# Altium PCB SoundNicerPCB.PcbDoc
Units mil, origin at the board's own origin, x right, y up, seen from the top; angles counter-clockwise.
Board outline 557.21 x 4336.74 mil, 2 copper layers (Top Layer, Bottom Layer); 44 components, 30 nets, 131 pads, 79 vias.
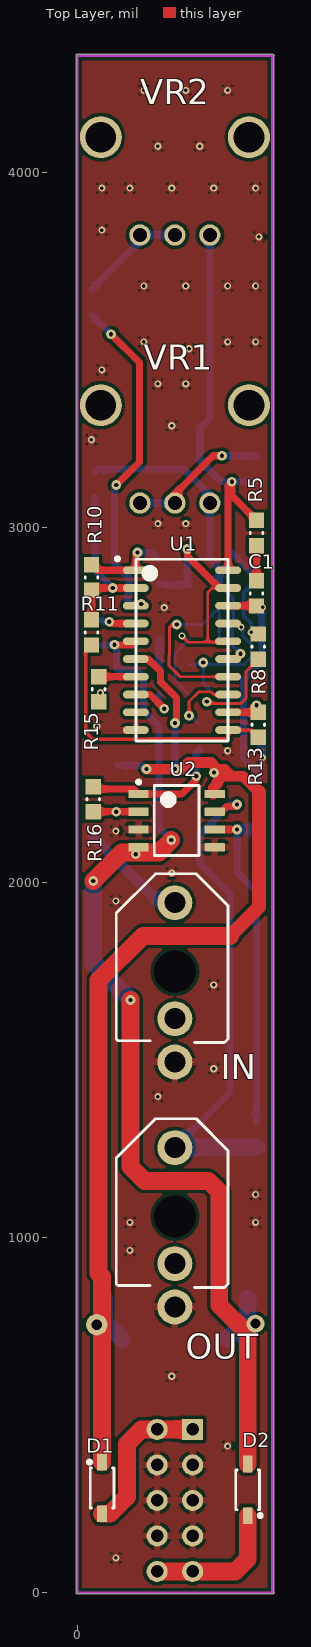
[diagram p0: Top Layer view]
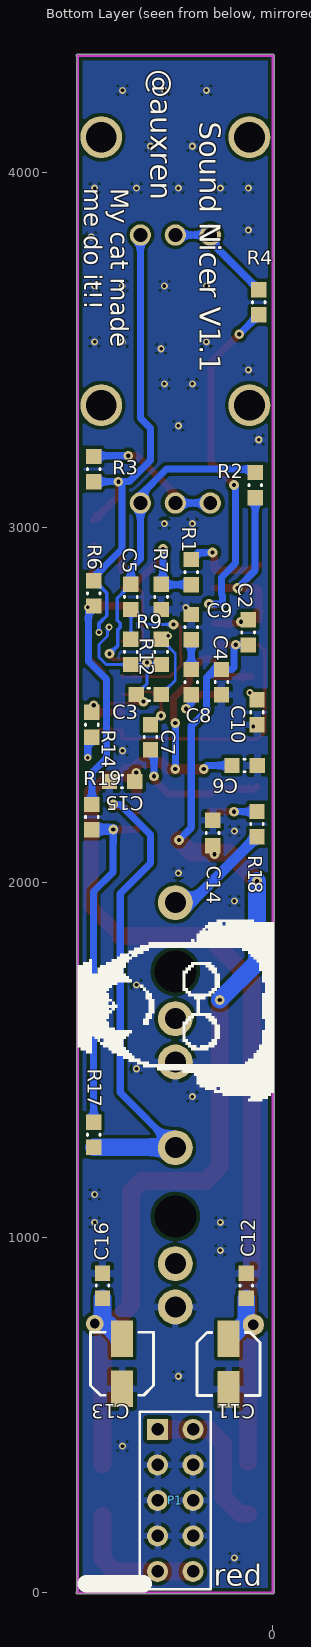
[diagram p1: Bottom Layer view, seen from below]

## Layer stack, top to bottom
Top Solder: solder mask 0.4, Solder Resist, Dk 3.5
Top Layer: signal copper 1.4
Dielectric 1: dielectric 12.6, FR-4, Dk 4.8
Bottom Layer: signal copper 1.4
Bottom Solder: solder mask 0.4, Solder Resist, Dk 3.5

## Board outline
-3.02,0 ccw(c0,0) 0,-3.01 551.18,-3.01 ccw(c551.18,0) 554.2,0 ccw(c551.18,0) 553.02,2.39 553.02,4327.61 ccw(c551.18,4330) 554.2,4330 ccw(c551.18,4330) 552.1,4332.87 ccw(c550,4330.71) 548.06,4333.02 1.94,4333.02 ccw(c0,4330.71) -3.02,4330.71

## Design rules (kind name [scope] priority, off if disabled: settings)
Clearance [All] p1: gap=10 ignorepadtopadclearanceinfootprint=FALSE except(0: Arc-Hole Track-Hole SMDPad-Hole THPad-Hole Via-Hole Fill-Hole Poly-Hole Region-Hole Text-Hole)
PlaneConnect [All] p1: planeconnectstyle=Relief reliefexpansion=20 reliefentries=4 reliefconductorwidth=20 reliefairgap=10
PolygonConnect [All] p1: connectstyle=Relief reliefconductorwidth=20 reliefentries=4 polygonreliefangle="90 Angle" airgapwidth=10
RoutingVias [All] p1: holewidth=11.81 width=27.56 viastyle="Through Hole" minholewidth=11.81 minwidth=27.56 maxholewidth=28 maxwidth=27.56
SolderMaskExpansion [All] p1: expansion=4
Width [All] p1: maxlimit=50 minlimit=8 preferedwidth=20
29 further rules are at their usual default settings.

## Components (designator, comment, footprint, x,y, rotation, side; value= is the part's Value field where it differs from the comment)
C1 "100pF" CAPC0603(1608)100_M 505,2815 r270 top value=100p
C2 "2.2uF" CAPC0603(1608)100_M 70,2705 r90 bottom value=2.2u
C3 "3.3nF" CAPC0603(1608)100_M 350,2530 r0 bottom value=3.3n
C4 "0.47uF" CAPC0603(1608)100_M 145,2565 r90 bottom
C5 "33nF" CAPC0603(1608)100_M 400,2805 r90 bottom value=33n
C6 "0.47uF" CAPC0603(1608)100_M 80,2330 r0 bottom
C7 "0.47uF" CAPC0603(1608)100_M 345,2410 r270 bottom
C8 "2.2uF" CAPC0603(1608)100_M 230,2565 r270 bottom value=2.2u
C9 "2.2uF" CAPC0603(1608)100_M 230,2720 r270 bottom value=2.2u
C10 "100nF" CAPC0603(1608)100_M 45,2480 r270 bottom
C11 "10uF" NIC-CAPA2-4X5.8_V 125,644.13 r270 bottom
C12 "100nF" CAPC0603(1608)100_M 75,865 r90 bottom
C13 "10uF" NIC-CAPA2-4X5.8_V 425,645 r90 bottom
C14 "100nF" CAPC0603(1608)100_M 170,2140 r270 bottom
C15 "100nF" CAPC0603(1608)100_M 425,2285 r0 bottom
C16 "100nF" CAPC0603(1608)100_M 480,865 r90 bottom
D1 "1N5819HW-7-F" DIOD-SOD-123-2_V 70,295 r90 top
D2 "1N5819HW-7-F" DIOD-SOD-123-2_V 480,290 r270 top
IN "Thonkicon jack" "Thonkiconn Pot PJ301M" 275,1750 r0 top (schematic designator J1)
OUT "Thonkicon jack" "Thonkiconn Pot PJ301M" 275,1060 r0 top (schematic designator J2)
P1 "Header 5X2" HDR2X5 325,460 r270 bottom
R1 "21.5k" RESC0603(1608)_M 230,2875 r90 bottom
R2 "21.5k" RESC0603(1608)_M 50,3120 r270 bottom
R3 "820" RESC0603(1608)_M 505,3165 r270 bottom
R4 "820" RESC0603(1608)_M 40,3635 r270 bottom
R5 "10k" RESC0603(1608)_M 505,2985 r90 top
R6 "18.2k" RESC0603(1608)_M 505,2815 r90 bottom
R7 "21.5k" RESC0603(1608)_M 315,2805 r90 bottom
R8 "39.2k" RESC0603(1608)_M 510,2665 r90 top
R9 "21.5k" RESC0603(1608)_M 315,2650 r270 bottom
R10 "21.5k" RESC0603(1608)_M 40,2860 r270 top
R11 "21.5k" RESC0603(1608)_M 40,2705 r270 top
R12 "21.5k" RESC0603(1608)_M 400,2650 r90 bottom
R13 "21.5k" RESC0603(1608)_M 510,2445 r270 top
R14 "21.5k" RESC0603(1608)_M 510,2445 r90 bottom
R15 "10.6k" RESC0603(1608)_M 60,2545 r90 top
R16 "75k" RESC0603(1608)_M 45,2235 r270 top
R17 "100k" RESC0603(1608)_M 505,1290 r90 bottom
R18 "100k" RESC0603(1608)_M 45,2165 r270 bottom
R19 "75k" RESC0603(1608)_M 510,2185 r90 bottom
U1 "V2153 Sound Enhancement IC" "SOIC20 - duplicate" 295,2655 r0 top
U2 "TL072ID" D0008A_N 280,2175 r0 top
VR1 "B10k" SonGueiPot 275,3345 r0 top
VR2 "B10k" SonGueiPot 275,4100 r0 top

## Footprints (in the part's own frame and the unit in brackets; to place one, negate y for a bottom-side part, rotate by r counter-clockwise, add the part's x,y. Pads: shape width x height; smd on the part's side, far side on the other; paste and mask are expansions set on the pad)
CAPC0603(1608)100_M [mm] "Chip Capacitor, Body 1.6x0.8mm, Height 1.0mm, IPC Low Density"
  rect 1.1x1.1 smd: 1(-0.9,0) 2(0.9,0)
  silkscreen extent -0.05,-0.45 0.05,0.45, body extent -0.87,-0.47 0.88,0.48, height 1
D0008A_N [mm] "SOIC, 8-Leads, Body 5x4mm, Pitch 1.27mm, IPC Medium Density"
  rrect17% 1.45x0.6 smd: 1(-2.725,1.905) 2(-2.725,0.635) 3(-2.725,-0.635) 4(-2.725,-1.905) 5(2.725,-1.905) 6(2.725,-0.635) 7(2.725,0.635) 8(2.725,1.905)
  silkscreen extent -2.85,-2.5 1.6,2.88, body extent -3,-2.45 3,2.45, height 1.63
DIOD-SOD-123-2_V [mm] "SOD-123, 2-Leads, Body 2.85x1.7mm (max), Pitch 3.7mm"
  rect 1.2x0.7 smd: 1(-1.85,0) 2(1.85,0)
  silkscreen extent -1.43,-0.85 1.97,1.02, body extent -1.42,-0.85 1.43,0.85, height 1.45
HDR2X5 [mm] "Connector; Header; 5x2 Position"
  rect 1.5x1.5 hole 0.9: 1(0,0)
  round 1.5 hole 0.9: 2(0,2.54) 3(2.54,0) 4(2.54,2.54) 5(5.08,0) 6(5.08,2.54) 7(7.62,0) 8(7.62,2.54) 9(10.16,0) 10(10.16,2.54)
  silkscreen extent -1.27,-1.27 11.43,3.81
NIC-CAPA2-4X5.8_V [mm] "Aluminum Electrolytic Capacitor, Diameter 4mm, Height 6.1mm, Pitch 3.6mm"
  rect 2.6x1.6 smd: 1(-1.8,0) 2(1.8,0)
  silkscreen extent -2.25,-2.25 2.25,2.25, body extent -2,-2 2,2, height 6.1
RESC0603(1608)_M [mm] "Chip Resistor, Body 1.6x0.8mm, IPC Low Density"
  rect 1.1x1.1 smd: 1(-0.9,0) 2(0.9,0)
  silkscreen extent -0.05,-0.45 0.05,0.45, body extent -0.85,-0.47 0.85,0.47, height 0.6
"SOIC20 - duplicate" [mm]
  oval 1.85x0.55 smd: 1(-3.302,5.715) 2(-3.302,4.445) 3(-3.302,3.175) 4(-3.302,1.905) 5(-3.302,0.635) 6(-3.302,-0.635) 7(-3.302,-1.905) 8(-3.302,-3.175) 9(-3.302,-4.445) 10(-3.302,-5.715) 11(3.302,-5.715) 12(3.302,-4.445) 13(3.302,-3.175) 14(3.302,-1.905) 15(3.302,-0.635) 16(3.302,0.635) 17(3.302,1.905) 18(3.302,3.175) 19(3.302,4.445) 20(3.302,5.715)
  silkscreen extent -4.75,-6.5 3.3,6.66, body extent -3.8,-6.48 3.8,6.48, height 2.65
SonGueiPot [mm]
  round 3 hole 2.2: 0(-5.3,0) 0(5.3,0)
  round 1.524 hole 1: 1(-2.5,-7) 2(0,-7) 3(2.5,-7)
  body extent -4.88,-7.23 4.88,5.32, height 20
"Thonkiconn Pot PJ301M" [mm] "PJ301 Thonkicon Jack from Thonk"
  round 1.524 hole 3: 0(0,0)
  round 2.5 hole 1.5: 1(0,-6.48) 2(0,-3.38) 3(0,4.92)
  silkscreen extent -4.19,-5.08 3.81,6.98, body extent -4.55,-10.29 4.44,5.71, height 14

## Part data
C1: library part CMP-1035-00002-1, "CAP", Case-EIA=0603, Mfr=AVX, Mfr_Pn=06032A101JAT2A, Distributor=Mouser, Distributor_Pn=581-06032A101JAT2A, Tolderance=10%
C2 C8 C9: library part CMP-1035-00002-1, "CAP", Case-EIA=0603, Mfr=Murata, Mfr_Pn=GRM188R61E225KA12D, Distributor=Mouser, Distributor_Pn=81-GRM188R61E225KA2D, Tolderance=10%
C3: library part CMP-1035-00002-1, "CAP", Case-EIA=0603, Mfr=AVX, Mfr_Pn=06035A332JAT2A, Distributor=Mouser, Distributor_Pn=581-06035A332JAT2A, Tolderance=10%
C4 C6 C7: library part CMP-1035-00002-1, "CAP", Mfr=Murata, Mfr_Pn=GCM188R71E474KA64J, Distributor=Mouser, Distributor_Pn=81-GCM188R71E474KA4J
C5: library part CMP-1035-00002-1, "CAP", Case-EIA=0603, Mfr=Murata, Mfr_Pn=GRM188R71H333KA61D, Distributor=Mouser, Distributor_Pn=81-GRM188R71H333KA61, Tolderance=10%
C10 C12 C14 C15 C16: library part CMP-1035-00002-1, "CAP", Mfr=AVX, Mfr_Pn=MM035C104KCZ2A, Distributor=Mouser, Distributor_Pn=581-MM035C104KCZ2A
C11 C13: library part CMP-0687-00016-1, "Aluminum Electrolytic Capacitor, UD Series, Low Impedance, 10 uF, 25 V, + / - 20%, -55 to 105 degC, Chip Type, 4 x 5.8 mm D x L, Pb-Free, Reel", Mfr=Nichicon, Mfr_Pn=UUD1E100MCL1GS, Distributor=Mouser, Distributor_Pn=647-UUD1E100MCL
D1 D2: library part CMP-0303-00003-1, "1.0 A Surface Mount Schottky Barrier Rectifier, 40 V, -65 to 125 degC, 2-Pin SOD-123 Package, RoHS, Tape and Reel", Mfr="Diodes Inc.", Distributor=Mouser, Distributor_Pn=621-1N5819HW-F, Mfr_Pn=1N5819HW-7-F
P1: "Header, 5-Pin, Dual row", LatestRevisionDate=17-Jul-2002, LatestRevisionNote="Re-released for DXP Platform.", Publisher="Altium Limited"
R1 R2 R7 R9 R10 R11 R12 R13 R14: library part CMP-1012-00002-1, "Res", Case-EIA=0603, Mfr=Susumu, Mfr_Pn=RG1608P-2152-D-T5, Tolerance="5 %", Distributor=Mouser, Distributor_Pn=754-RG1608P-2152DT5
R3 R4: library part CMP-1012-00002-1, "Res", Case-EIA=0603, Mfr=Susumu, Mfr_Pn=RR0816P-821-D, Tolerance="5 %", Distributor=Mouser, Distributor_Pn=754-RR0816P-821D
R5: library part CMP-1012-00002-1, "Res", Case-EIA=0603, Mfr=Susumu, Mfr_Pn=RR0816P-103-D, Tolerance="5 %", Distributor=Mouser, Distributor_Pn=754-RR0816P-103D
R6: library part CMP-1012-00002-1, "Res", Case-EIA=0603, Mfr=Susumu, Mfr_Pn=RR0816P-1822-D-26C, Tolerance="5 %", Distributor=Mouser, Distributor_Pn=754-RR0816P-1822D26C
R8: library part CMP-1012-00002-1, "Res", Case-EIA=0603, Mfr=KOA, Mfr_Pn=RK73H1JTTD3922F, Tolerance="5 %", Distributor=Mouser, Distributor_Pn=660-RK73H1JTTD3922F
R15: library part CMP-1012-00002-1, "Res", Case-EIA=0603, Mfr=Koa, Mfr_Pn=RN73H1JTTD1062D100, Tolerance="5 %", Distributor=Mouser, Distributor_Pn=660-RN73H1JT1062D100
R16 R19: library part CMP-1012-00002-1, "Res", Case-EIA=0603, Mfr=Susumu, Mfr_Pn=RR0816P-753D, Tolerance="5 %", Distributor=Mouser, Distributor_Pn=754-RR0816P-753D
R17 R18: library part CMP-1012-00002-1, "Res", Case-EIA=0603, Mfr=Susumu, Mfr_Pn=RR0816P-104-D, Tolerance="5 %", Distributor=Mouser, Distributor_Pn=754-RR0816P-104D
U1: library part CoolaudioV2153, "V2153"
U2: library part CMP-0015-00077-2, "Dual Low-Noise JFET-Input General-Purpose Operational Amplifier, 7 to 36 V, -40 to 85 degC, 8-pin SOIC (D8), Green (RoHS & no Sb/Br)", Mfr="ST Micro", Mfr_Pn=TL072IDT, Distributor=Mouser, Distributor_Pn=511-TL072IDT
VR1 VR2: library part CMP-0972-00009-1, "Trimming Potentiometer, 5K Ohm +/- 10%, -55 to 125 degC, 3-Pin 19.05 x 4.83 x 6.6 mm THD, Transparent Housing, RoHS", Manufacturer=Bourns, PartNumber=3006P-7-502ZLF, Resistance (kOhm)=5, Resistance Tolerance="+/- 10%", Temperature Range="-55 to 125 degC", ComponentLink1Description="Manufacturer URL", ComponentLink1URL=http://www.bourns.com/, ComponentLink2Description=Datasheet, ComponentLink2URL=http://www.bourns.com/data/global/pdfs/3006.pdf, ComponentLink3Description="Package Specification", ComponentLink3URL=http://www.bourns.com/data/global/pdfs/3006.pdf, DatasheetVersion=Apr-14, Mounting Technology="Through Hole", Number of Turns=15, PackageDescription="3-Pin THD, Body 19.05 x 4.83 mm, Height 6.6 mm", PackageReference=3006P-3, PackageVersion=Apr-14, RoHS=TRUE, Rotational Life="200 Cycles"

## Free pads (board coordinates)
  round 60 hole 30: 2(55,755)

## Via types
v1: diameter 20, hole 10, Top Layer to Bottom Layer, tented both sides, 49 vias
v2: diameter 27.56, hole 11.81, Top Layer to Bottom Layer, tented both sides, 29 vias
v3: diameter 50, hole 28, Top Layer to Bottom Layer, tented both sides, 1 vias

## Nets (pads, with @x,y where several pads share a name; then routed paths per layer and width w, separated by ;. In a path a pad name is that pad's centre, name@x,y a point inside that pad or via, vN(x,y) a via of type N, cw(c..) or ccw(c..) an arc to the next point about the centre after c; other vN are vias at no path point)
+12V: C6.2 C11.1 C12.1 C15.1 D1.2 pad.2 U1.6 U2.8 | length 3252.6
  Top Layer w20: U1.6 200,2630 235,2595 235,2565 280,2520 280,2455 v2(275,2450)
  Top Layer w30: v2(195,2320) v2(275,2320) 294.29,2320 313.07,2338.78 376.93,2338.78 395.71,2320 415,2320 435,2300 ; U2.8@383.35,2250 383.35,2267.64 395,2279.29 395,2285 410,2300 435,2300 ; 512,2255 467,2300 435,2300
  Top Layer w40: 430,1850 512,1932 512,2255
  Top Layer w50: D1.2 70,890 60,900 60,1725 185,1850 430,1850
  Bottom Layer w20: C6.2 185,2330 ; v2(275,2320) v2(275,2450)
  Bottom Layer w50: C12.1 75,765 C11.1
  other v2: 385,2310
-12V: C2.1 C4.2 C13.2 C14.2 C16.1 D2.1 U1.5 U2.4 | length 3078.3
  Top Layer w20: v2(105,2670) 155,2670 U1.5
  Top Layer w50: v2(45,2005) 125,2085 230,2085 v2(265,2120) ; v2(150,1670) 150,1200 190,1160 370,1160 400,1130 400,810 480,730 D2.1
  Bottom Layer w20: C2.1 104.57,2669.57 v2(105,2670) 110,2665 110,2605.87 115.43,2600.43 C4.2 164.61,2600.43 186.65,2578.39 186.65,2489.47 184.27,2487.09 230,2441.36 230,2155 v2(265,2120)
  Bottom Layer w50: v2(45,2005) 45,1775 v2(150,1670) ; C13.2 480,770.87 C16.1
  other v2: 165,2080
  other v3: 501.97,757.87
GND: C4.1 C6.1 C9.1 C10.2 C11.2 C12.2 C13.1 C14.1 C15.2 C16.2 IN.1 OUT.1 P1.3 P1.4 P1.5 P1.6 P1.7 P1.8 R7.1 R14.1 U1.10 U2.3 U2.5 | length 62
  Bottom Layer w20: R14.1 521.65,2397.91 v1(521.65,2352.36)
  other v1: 108.74,98.11 423.7,413.07 266.22,609.92 148.11,964.25 148.11,1042.99 502.44,1042.99 502.44,1121.73 226.85,1397.32 384.33,1476.06 384.33,1712.28 108.74,1948.5 266.22,2027.24 108.74,2145.35 423.7,2371.73 55,2440 245,2775 226.85,3011.5 305.59,3011.5 39.84,3247.72 266.22,3287.09 226.85,3405.2 305.59,3405.2 69.37,3444.57 314.96,3503.94 187.48,3523.31 423.7,3523.31 502.44,3523.31 187.48,3680.79 305.59,3680.79 423.7,3680.79 502.44,3680.79 511.81,3818.9 69.37,3838.27 69.37,3956.38 148.11,3956.38 266.22,3956.38 384.33,3956.38 502.44,3956.38 226.85,4074.49 344.96,4074.49 187.48,4231.97 305.59,4231.97 423.7,4231.97
NetC1_1: C1.1 R5.1 | length 99.1
  Top Layer w20: C1.1 R5.1
NetC1_2: C1.2 R6.1 R19.2 U1.18 | length 683.6
  Top Layer w20: U1.18 C1.2@504.57,2780
  Bottom Layer w20: R6.1 520,2764.57 520,2623.68 468.35,2572.03 468.35,2351.65 510,2310 R19.2
  other v1: 522.13,2775.28
NetC2_2: C2.2 U1.4 | length 99.3
  Top Layer w20: v2(90,2735) 95,2730 U1.4
  Bottom Layer w20: C2.2 75.43,2735 v2(90,2735)
NetC3_1: C3.1 R1.1 R7.2 R9.1 U1.16 U1.19 | length 869.8
  Top Layer w8: v1(295,2695) 312.5,2677.5 367.5,2677.5 ; U1.16 417.5,2687.5 407.5,2677.5 367.5,2677.5 ; U1.19 400,2830 380,2830 367.5,2817.5 367.5,2677.5
  Top Layer w20: v2(310,2940) 310,2920 U1.19@400,2830
  Bottom Layer w8: C3.1 314.57,2530.43 275,2570 275,2645.43 R9.1
  Bottom Layer w20: R1.1 314.13,2839.57 R7.2 310,2845.43 v2(310,2940)
NetC3_2: C3.2 R8.1 R9.2 R12.1 U1.17 | length 620
  Top Layer w8: v2(365,2510) 365,2505.35 365.17,2505.17 460.87,2505.17 475.42,2519.72 475.42,2594.98 R8.1
  Bottom Layer w8: R9.2 315.43,2615 v2@355,2615 ; C3.2 355,2560.43 v2@355,2615 ; v1(461.65,2720) v1@465,2720 ; v1@466,2714.94 466,2695.06 490,2671.06 490,2635 469.57,2614.57 R12.1 399.57,2615 v2@355,2615
  other v2: 355,2620
NetC5_1: C5.1 R12.2 U1.14 | length 548.5
  Top Layer w8: v2(280.13,2727.5) 282.5,2727.5 275,2735 260,2720 260,2641.41 258.87,2640.29 258.87,2611.13 290,2580 U1.14 424.06,2580.94 U1.14@424.06,2584.17
  Bottom Layer w8: v2(280.13,2727.5) 352.5,2727.5 394.57,2769.57 C5.1 R12.2
NetC5_2: C5.2 R2.1 U1.15 VR1.3 | length 898.7
  Top Layer w10: U1.15 450,2630 465,2645 v2(460,2645)
  Bottom Layer w10: C5.2 438.78,2801.65 438.78,2739.13 430,2730.36 430,2719.95 436.65,2713.3 436.65,2668.35 v2(460,2645)
  Bottom Layer w20: R2.1 59.57,3165 300,3165 373.43,3091.57 VR1.3 373.43,2911.57 400,2885 C5.2
NetC7_1: C7.1 U1.13 | length 204.9
  Top Layer w8: v2(315,2470) 315,2510 342.78,2537.78 376.51,2537.78 384.29,2530 U1.13
  Bottom Layer w8: v2(315,2470) 320.43,2470 C7.1
NetC7_2: C7.2 R16.1 U2.1 | length 403.7
  Top Layer w20: R16.1 51.65,2263.78 158.94,2263.78 U2.1 295,2250 335,2290 v2(335,2300)
  Bottom Layer w20: v2(335,2300) 335,2364.57 C7.2
NetC8_1: C8.1 C9.2 | length 84.1
  Bottom Layer w20: C8.1 C9.2
NetC8_2: C8.2 U1.8 | length 142.3
  Top Layer w20: U1.8 205,2530 v2(245,2490)
  Bottom Layer w20: C8.2 230,2505 v2(245,2490)
NetC10_1: C10.1 R15.1
  other v1: 65,2535
NetD1_1: D1.1 P1.1 P1.2 | length 441.4
  Top Layer w50: D1.1 92.17,222.17 140,270 140,420 180,460 P1.2 P1.1
NetD2_2: D2.2 P1.9 P1.10 | length 391.7
  Top Layer w50: P1.10 P1.9 445,60 480,95 D2.2
NetJ1_3: IN.3 R18.2 | length 307
  Bottom Layer w30: R18.2 230.87,1943.7 IN.3
NetJ2_3: OUT.3 R17.1 U2.7 | length 1427.9
  Top Layer w20: U2.7@383.35,2200 U2.7 405,2200 420,2215 450,2215 v2(450,2220)
  Bottom Layer w20: OUT.3 275.87,1254.57 430,1408.7 430,1970 345,2055 345,2135 430,2220 v2(450,2220)
  Bottom Layer w50: OUT.3@275.87,1254.57 R17.1
NetR1_2: R1.2 R10.1 U1.1 | length 251.6
  Top Layer w20: R10.1 55.43,2880 U1.1 165,2925 v2(170,2930)
  Bottom Layer w20: v2(170,2930) 210.43,2930 R1.2
NetR2_2: R2.2 R10.2 R11.1 U1.2 | length 486.7
  Top Layer w20: R11.1 R10.2 45.43,2830 v2(100,2830) U1.2
  Bottom Layer w20: R2.2 50,2880 v2(100,2830)
NetR3_1: R3.1 VR1.1 VR1.2 | length 399.4
  Top Layer w20: VR1.2 275,3095 382.5,3202.5 v2(407.5,3202.5)
  Bottom Layer w20: VR1.1 VR1.2 ; v2(407.5,3202.5) 502.93,3202.5 R3.1
NetR3_2: R3.2 R5.2 R6.2 R8.2 U1.20 VR2.3 | length 1710.7
  Top Layer w20: U1.20 425,3119.13 v2(435.43,3129.57) 435.43,3090 R5.2
  Bottom Layer w10: v1(490,2705) 490,2730.05 468.35,2751.7 468.35,2816.22 502.56,2850.43 R6.2
  Bottom Layer w20: VR2.3 373.43,3308.43 345,3280 345,3190 405.43,3129.57 v2(435.43,3129.57) ; R6.2 505,2860 425,2940 425,3119.13 v2(435.43,3129.57) ; R3.2 v2(435.43,3129.57)
NetR4_1: R4.1 VR2.1 VR2.2 | length 309
  Bottom Layer w20: R4.1 176.57,3807.01 VR2.1 VR2.2
NetR4_2: R4.2 U1.3 | length 981.2
  Top Layer w20: v2(95,3545) 175,3465 175,3185 v2(110,3120) ; U1.3 162.14,2782.86 164.28,2785 v2(180,2785)
  Bottom Layer w20: R4.2 94.57,3545 v2(95,3545) ; v2(110,3120) 105,3115 105,2900 145,2860 145,2811.36 142.14,2808.5 142.14,2782.86 144.28,2785 v2(180,2785)
NetR11_2: R11.2 R13.2 U1.11 | length 780.8
  Top Layer w10: R11.2 23.35,2652.91 23.35,2424.65 43.83,2404.17 201.29,2404.17 202.11,2405 425,2405 U1.11 489.57,2430 R13.2
NetR13_1: R13.1 R14.2 U1.12 | length 85.2
  Top Layer w20: U1.12 509.57,2480 R13.1
  other v2: 505,2500
NetR15_2: R15.2 U1.7 | length 104.6
  Top Layer w20: R15.2 U1.7@164.57,2580.43
NetR16_2: R16.2 R18.1 U2.2 | length 195.8
  Top Layer w20: R16.2@45.43,2200 v2(110,2200) U2.2 U2.2@176.65,2200
  Bottom Layer w20: R18.1@45.43,2200 v2(110,2200)
NetR17_2: R17.2 R19.1 U2.6 | length 974.2
  Top Layer w20: U2.6@383.35,2150 U2.6 v2(450,2150)
  Bottom Layer w20: v2(450,2150) 450,2030 505,1975 R17.2
  Bottom Layer w30: v2(450,2150) 450.43,2150.43 R19.1@510,2150.43
pads on no net: IN.0 IN.2 OUT.0 OUT.2 U1.9 VR1.0 VR2.0

## Polygon pours and split planes (outlines as drawn)
GND on Top Layer "Bottom_GND_POUR" (solid, pour order 2): 0,0 0,4330.71 550,4330.71 550,-5 545,-10
GND on Bottom Layer "Bottom_GND_POUR" (solid, pour order 4): 0,0 550,0 550,4325 545,4330 0,4330

## Keep-outs
Keep-Out Layer:
  lines w8: 0,4330 551.18,4330 ; 0,4330.71 0,0 551.18,0 ; 550,0 550,4330.71

## Silkscreen, mask and mechanical layers (free items; w line width, h text height)
Bottom Overlay:
  drawing of 4 lines, arcs and shapes, not listed
  text "@auxren" at 344.49,4291.34 h60 r90
  text "Sound Nicer V1.1" at 206.69,4143.7 h60 r90
  text "My cat made  / me do it!!" at 531.5,3956.69 h50 r90
  text "red" at 167.32,19.68 h60